# Altium PCB MAGI'sCore-AU.PcbDoc
Units mil, origin at the board's own origin, x right, y up, seen from the top; angles counter-clockwise.
Board outline 6000 x 4000 mil, 2 copper layers (Top Layer, Bottom Layer); 15 components, 32 nets, 96 pads, 17 vias.
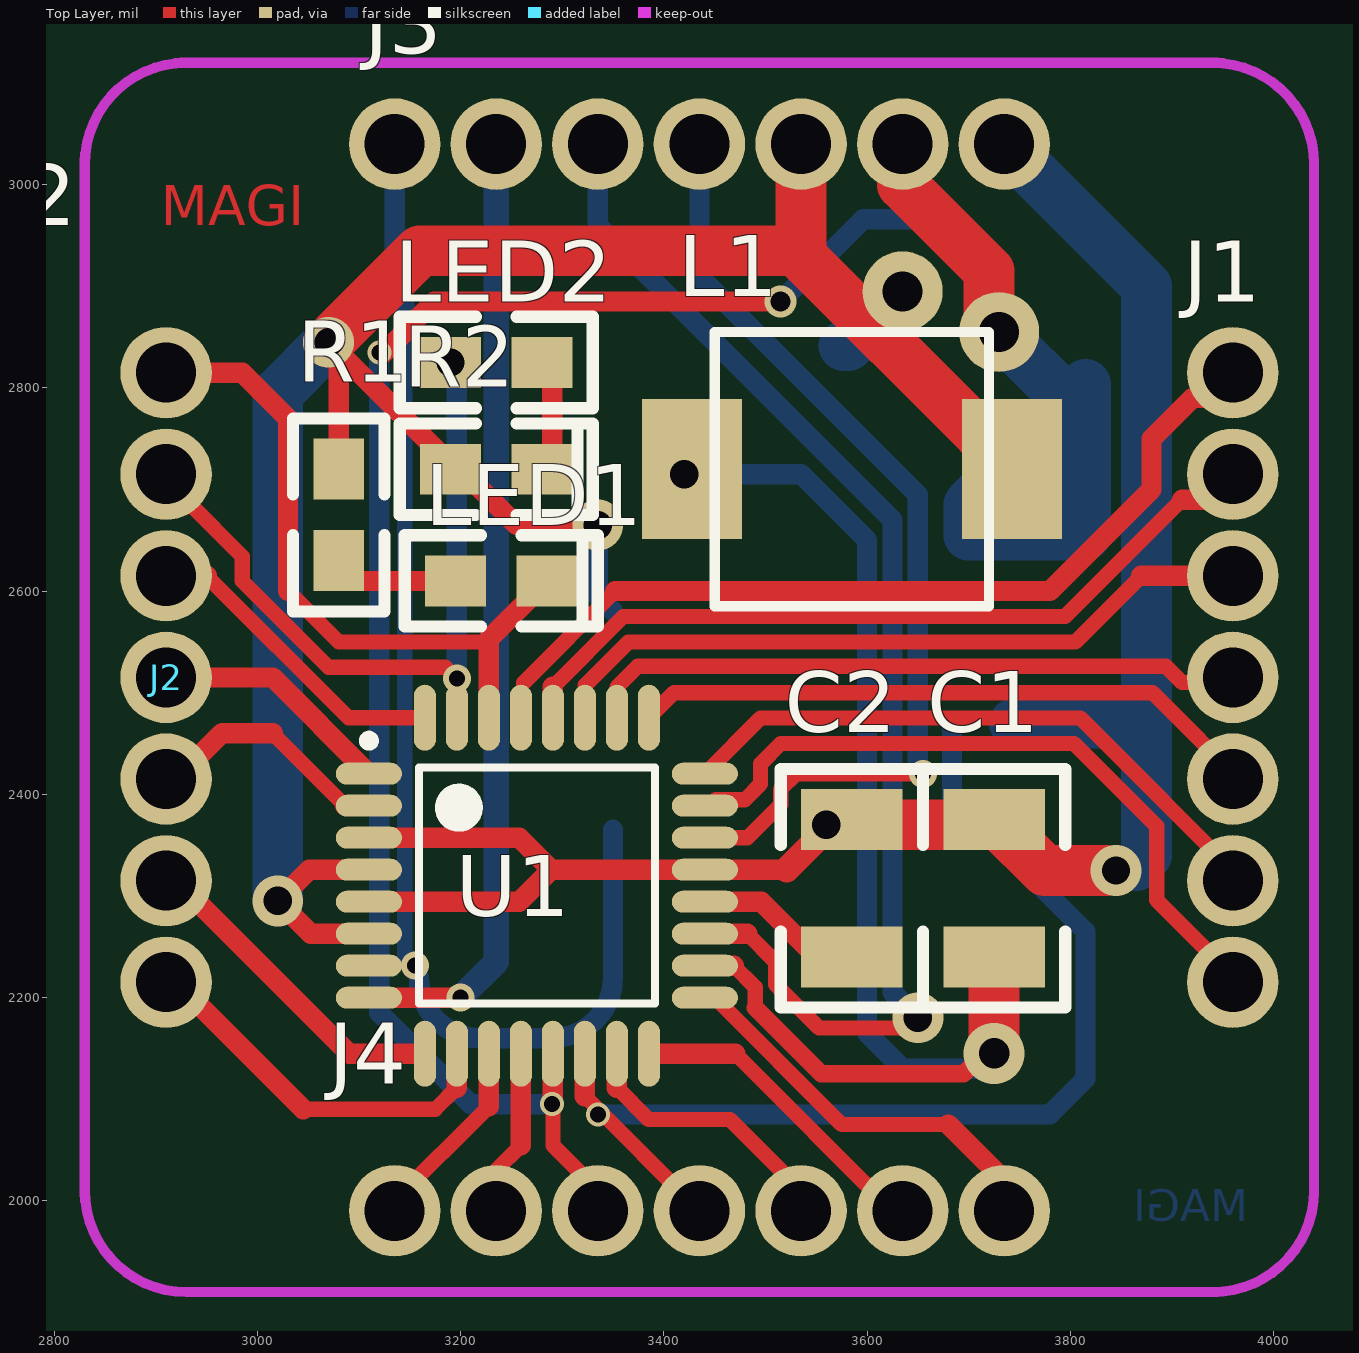
[diagram p0: Top Layer view]
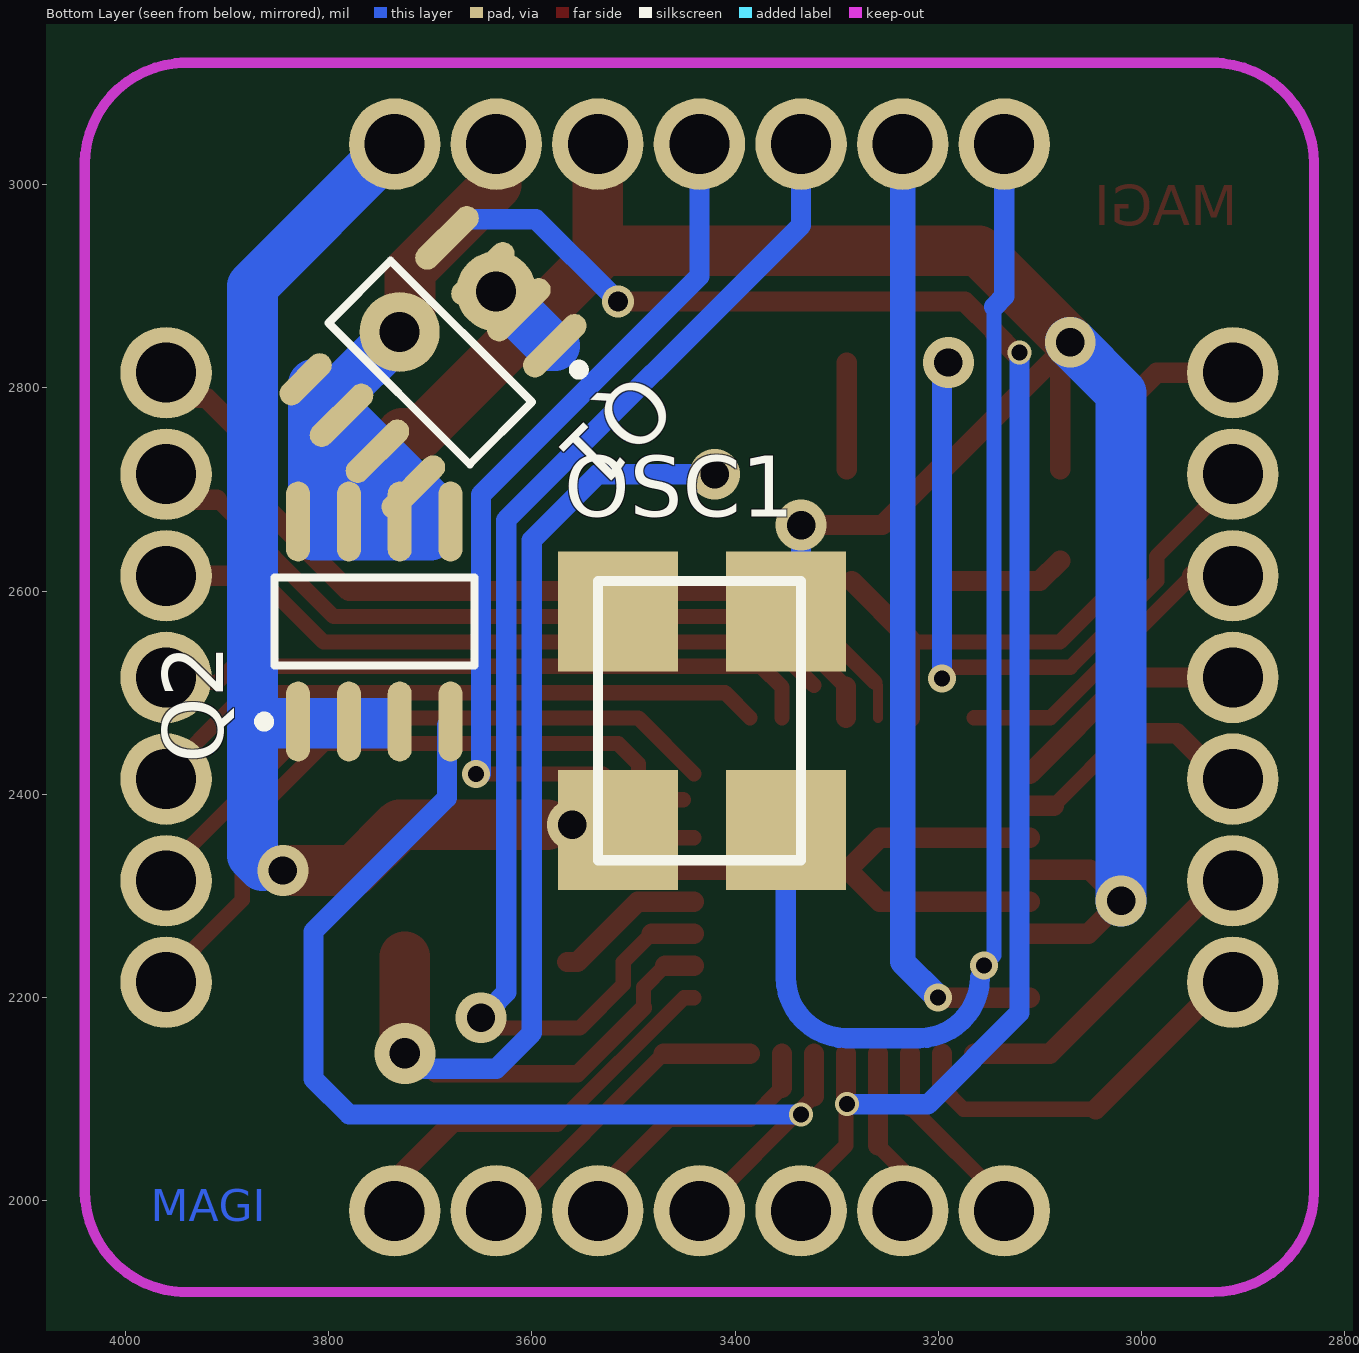
[diagram p1: Bottom Layer view, seen from below]

## Layer stack, top to bottom
Top Layer: signal copper 1.4
Dielectric: dielectric 12.6, FR-4, Dk 4.8
Bottom Layer: signal copper 1.4

## Board outline
1000,1000 7000,1000 7000,5000 1000,5000

## Design rules (kind name [scope] priority, off if disabled: settings)
Clearance [All] p1: gap=5
ComponentClearance [All] p1: gap=0 collisioncheckmode=3 verticalgap=0 showdistances=FALSE
PolygonConnect [All] p1: connectstyle=Relief reliefconductorwidth=10 reliefentries=4 polygonreliefangle="90 Angle" airgapwidth=10
RoutingVias [All] p1: holewidth=28 width=50 viastyle="Through Hole" minholewidth=28 minwidth=50 maxholewidth=28 maxwidth=50
SilkToSilkClearance [All] p1: silktosilkclearance=0
SolderMaskExpansion [All] p1: expansion=4
Width [All] p1: maxlimit=100 minlimit=10 preferedwidth=10
26 further rules are at their usual default settings.

## Components (designator, comment, footprint, x,y, rotation, side; value= is the part's Value field where it differs from the comment)
C1 "CAP_1" 1210 3725,2375 r270 top
C2 "CAP_1" 1210 3585,2375 r270 top
J1 "CON7" CON7 3960,2215 r90 top
J2 "CON7" CON7 2910,2815 r270 top
J3 "CON7" CON7 3735,3040 r180 top
J4 "CON7" CON7 3135,1990 r0 top
L1 "INDUCTOR" 22uh 3585,2720 r0 top
LED1 "LED_3" 0805 3195,2610 r0 top
LED2 "LED_3" 0805 3280,2825 r180 top
OSC1 "Oscillator" Oscillator 3410,2460 r270 bottom
Q1 "SI9424DY" SO-8_N#1 3700,2825 r315 bottom
Q2 "SI9426DY" SO-8_N#2 3755,2570 r90 bottom
R1 "RES1_1" 0805 3080,2630 r90 top
R2 "RES1_1" 0805 3280,2720 r180 top
U1 "ATmega8A-AU" 32A_N 3275,2310 r0 top

## Footprints (in the part's own frame and the unit in brackets; to place one, negate y for a bottom-side part, rotate by r counter-clockwise, add the part's x,y. Pads: shape width x height; smd on the part's side, far side on the other; paste and mask are expansions set on the pad)
22uh [mm]
  rect 2.5x3.5 smd: 1(-4,0) 2(4,0)
  silkscreen extent -3.43,-3.43 3.43,3.43
32A_N [mm] "32-Pin Thin Quad Flat Pack 0.8 mm Pitch, IPC Medium Density"
  oval 1.65x0.55 smd: 1(-4.2,2.8) 2(-4.2,2) 3(-4.2,1.2) 4(-4.2,0.4) 5(-4.2,-0.4) 6(-4.2,-1.2) 7(-4.2,-2) 8(-4.2,-2.8) 17(4.2,-2.8) 18(4.2,-2) 19(4.2,-1.2) 20(4.2,-0.4) 21(4.2,0.4) 22(4.2,1.2) 23(4.2,2) 24(4.2,2.8)
  oval 0.55x1.65 smd: 9(-2.8,-4.2) 10(-2,-4.2) 11(-1.2,-4.2) 12(-0.4,-4.2) 13(0.4,-4.2) 14(1.2,-4.2) 15(2,-4.2) 16(2.8,-4.2) 25(2.8,4.2) 26(2,4.2) 27(1.2,4.2) 28(0.4,4.2) 29(-0.4,4.2) 30(-1.2,4.2) 31(-2,4.2) 32(-2.8,4.2)
  silkscreen extent -4.32,-2.95 2.95,3.75, body extent -3.5,-3.5 3.5,3.5, height 1.2
0805 [mil]
  rect 60x50 smd: 1(0,0) 2(90,0)
  silkscreen extent -50,-45 140,45
1210 [mil]
  rect 60x100 smd: 1(0,0) 2(135,0)
  silkscreen extent -50,-70 185,70
CON7 [mil]
  round 90 hole 59.06: 1(0,0) 2(100,0) 3(200,0) 4(300,0) 5(400,0) 6(500,0) 7(600,0)
Oscillator [mil] "7mm*5mm"
  rect 118.11x118.11 smd: 1(-120,-105) 2(95,-105) 3(95,60) 4(-120,60)
  silkscreen extent -150,-125 125,75
SO-8_N#1 [mm] "SOIC, 8-Leads, Body 4.9x3.9mm, Pitch 1.27mm, IPC Medium Density"
  oval 2x0.6 smd: 1(-2.5,1.905) 2(-2.5,0.635) 3(-2.5,-0.635) 4(-2.5,-1.905) 6(2.5,-0.635) 7(2.5,0.635) 8(2.5,1.905)
  oval 1.6x0.6 smd: 5(2.5,-1.905)
  silkscreen extent -2.62,-2.5 1.1,2.88, body extent -2,-2.5 2,2.5, height 1.75
SO-8_N#2 [mm] "SOIC, 8-Leads, Body 4.9x3.9mm, Pitch 1.27mm, IPC Medium Density"
  oval 2x0.6 smd: 1(-2.5,1.905) 2(-2.5,0.635) 3(-2.5,-0.635) 4(-2.5,-1.905) 5(2.5,-1.905) 6(2.5,-0.635) 7(2.5,0.635) 8(2.5,1.905)
  silkscreen extent -2.62,-2.5 1.1,2.88, body extent -2,-2.5 2,2.5, height 1.75

## Part data
C1 C2: "Capacitor"
J1 J2 J3 J4: "Connector"
Q1: "P-Channel 2.5V (G-S)  MOSFET"
Q2: "N-Channel 2.5V (G-S) Rated  MOSFET"
U1: "8-bit AVR Microcontroller, 8KB Flash, 512 Bytes EEPROM, 1KB SRAM, 32-pin TQFP, Industrial Grade (-40癈 to 85癈)"

## Free pads (board coordinates)
  round 78.74 hole 39.37: 1(3635,2895) 2(3730,2855)

## Via types
v1: diameter 50, hole 28, Top Layer to Bottom Layer, 8 vias
v2: diameter 27.56, hole 15.75, Top Layer to Bottom Layer, 4 vias
v3: diameter 23.62, hole 15.75, Top Layer to Bottom Layer, 3 vias
v4: diameter 60, hole 30, Top Layer to Bottom Layer, 1 vias
v5: diameter 31.5, hole 19.68, Top Layer to Bottom Layer, 1 vias

## Nets (pads, with @x,y where several pads share a name; then routed paths per layer and width w, separated by ;. In a path a pad name is that pad's centre, name@x,y a point inside that pad or via, vN(x,y) a via of type N, cw(c..) or ccw(c..) an arc to the next point about the centre after c; other vN are vias at no path point)
ADC6: J3.5 U1.19 | length 1239.5
  Top Layer w15: 3482.24,2262.76 3510,2235 3510,2212.72 3552.72,2170 3645,2170 v1@3650,2175
  Top Layer w20: U1.19 3482.24,2262.76
  Bottom Layer w20: J3.5 3335,2960 3625,2670 3625,2205 v1@3640,2190
  other v1: 3650,2180
ADC7: J3.4 U1.22 | length 958.5
  Top Layer w15: U1.22 3482.24,2357.24 3515,2390 3515,2405 3530,2420 v2(3655,2420)
  Bottom Layer w20: J3.4 3435,2910 3650,2695 v2@3650,2420
GND: C1.1 C2.1 J3.1 OSC1.2 Q2.1 Q2.2 Q2.3 U1.3 U1.5 U1.21 | length 1870.2
  Top Layer w20: U1.5 3257.76,2294.25 3289.25,2325.75 ; U1.3 3257.76,2357.24 3289.25,2325.75 ; 3520.75,2325.75 U1.21 3289.25,2325.75
  Top Layer w25: 3520.75,2325.75 C2.1@3565,2370
  Top Layer w30: C2.1@3565,2370 C2.1@3585,2370
  Top Layer w50: C2.1@3585,2370 3730,2370 3775,2325 v1@3835,2325
  Bottom Layer w50: J3.1 3875,2900 3875,2470 ; 3745,2470 3875,2470 ; v1@3865,2330 3875,2340 3875,2470
  other v1: 3845,2325 3560,2370
MISO: J4.6 U1.16 | length 313.8
  Top Layer w15: 3470.35,2144.65 J4.6@3625,1990
  Top Layer w20: U1.16 3470.35,2144.65 ; J4.6@3625,1990 J4.6
MOSI: J4.5 U1.15 | length 276.6
  Top Layer w15: 3353.74,2111.26 3385,2080 3465,2080 J4.5@3535,2010
  Top Layer w20: 3353.74,2111.26 U1.15 ; J4.5 J4.5@3535,2010
NetC1_2: C1.2 L1.1 U1.18 | length 1269.2
  Top Layer w15: U1.18@3468.74,2231.26 3490,2210 3490,2190
  Top Layer w17: 3490,2190 3555,2125 3695,2125 v4@3725,2155
  Top Layer w20: U1.18 U1.18@3468.74,2231.26
  Top Layer w50: v4@3725,2140 v4(3725,2145) ; v4@3725,2155 C1.2
  Bottom Layer w20: v1(3420,2715) 3535,2715 3600,2650 3600,2165 3635,2130 v4@3720,2130
NetC2_2: C2.2 U1.20 | length 149.2
  Top Layer w20: U1.20 3495.75,2294.25 3555,2235 C2.2@3565,2235
NetJ1_1: J1.1 U1.23 | length 718.4
  Top Layer w15: U1.23@3451.02,2394.57 3479.57,2394.57 3495,2410 3495,2430 3515,2450 3803.79,2450 3885,2368.79 3885,2295.95 3975,2205.95 J1.1@3975,2190
NetJ1_2: J1.2 U1.24 | length 645.7
  Top Layer w15: U1.24 3495.12,2475 3810,2475 3975,2310 J1.2@3975,2290
NetJ1_3: J1.3 U1.25 | length 654.9
  Top Layer w15: U1.25 3409.88,2500 3880.95,2500 3975,2405.95 J1.3@3975,2390
NetJ1_4: J1.4 U1.26 | length 646.4
  Top Layer w15: U1.26 3353.74,2505.43 3374.21,2525.91 3894.09,2525.91 3910,2510 J1.4@3955,2510
NetJ1_5: J1.5 U1.27 | length 707.7
  Top Layer w15: U1.27@3322.24,2507.24 3365,2550 3805,2550 3870,2615
  Top Layer w20: 3870,2615 3950,2615 J1.5@3975,2590
NetJ1_6: J1.6 U1.28 | length 791
  Top Layer w15: U1.28@3290.75,2505.75 3360,2575 3795,2575 3910,2690
  Top Layer w20: U1.28 U1.28@3290.75,2505.75 ; 3910,2690 J1.6@3975,2690
NetJ2_3: J2.3 U1.32 | length 302.6
  Top Layer w15: J2.3@2950,2615 3089.65,2475.35 U1.32
  Top Layer w20: J2.3@2920,2615 J2.3@2950,2615
NetJ2_4: J2.4 U1.1 | length 228.9
  Top Layer w20: J2.4@2920,2515 3014.88,2515 U1.1
NetJ2_5: J2.5 U1.2 | length 237.8
  Top Layer w15: 3015,2460 U1.2@3086.26,2388.74
  Top Layer w20: J2.5@2920,2415 2965,2460 3015,2460 ; U1.2@3086.26,2388.74 U1.2
NetJ2_6: J2.6 U1.9 | length 315.3
  Top Layer w20: J2.6@2920,2315 3090.35,2144.65 U1.9
NetJ2_7: J2.7 U1.10 | length 370.2
  Top Layer w15: 3045,2090 3175,2090 3196.26,2111.26
  Top Layer w20: J2.7@2920,2215 3045,2090 ; 3196.26,2111.26 U1.10
NetJ4_1: J4.1 U1.11 | length 193.1
  Top Layer w15: J4.1@3135,2000 3227.76,2092.76
  Top Layer w20: J4.1 J4.1@3135,2000 ; 3227.76,2092.76 U1.11
NetJ4_2: J4.2 U1.12 | length 164.7
  Top Layer w15: J4.2 3235,2030 3259.25,2054.25
  Top Layer w20: 3259.25,2054.25 U1.12
NetLED1_1: LED1.1 R1.1 | length 123.3
  Top Layer w20: R1.1 3100,2610 LED1.1
NetLED2_1: LED2.1 R2.1 | length 105
  Top Layer w20: R2.1@3290,2720 LED2.1@3290,2825
OC1A: J4.3 Q1.4 U1.13 | length 1652.8
  Top Layer w15: v3@3290.75,2095 3290.75,2054.25 3335,2010 J4.3
  Top Layer w20: v3@3122.5,2832.5 3145,2855 3145,2856.21 3173.79,2885 v5(3515,2885) ; v3@3290.75,2095 U1.13
  Bottom Layer w20: v3(3120,2835) 3120,2185 3210,2095 v3(3290,2095) ; v5@3515,2890 3520,2890 3596.07,2966.07 3665,2966.07 Q1.4
OC1B: J4.4 Q2.4 U1.14 | length 1103.3
  Top Layer w15: 3322.24,2102.76 J4.4
  Top Layer w20: 3322.24,2102.76 U1.14
  Bottom Layer w19.68: v3(3335,2085) 3780,2085 3815,2120 3815,2265 3683.62,2396.38 3683.62,2467.95 Q2.4
PB6: J3.7 OSC1.3 U1.7 | length 1221.7
  Bottom Layer w15: 3145,2880 3145,2241.26 v2(3155,2231.26)
  Bottom Layer w20: J3.7 3135,2890 3145,2880 ; v2@3158.86,2220 ccw(c3218.86,2220) 3218.86,2160 3290,2160 ccw(c3290,2220) 3350,2220 OSC1.3
PB7: J3.6 U1.8 | length 944.9
  Top Layer w20: U1.8 3199.76,2199.76 v2(3200,2200)
  Bottom Layer w25: v2(3200,2200) 3235,2235 J3.6
PO: J3.2 pad.2 Q1.5 Q1.6 Q1.7 Q1.8 Q2.5 Q2.6 Q2.7 Q2.8 | length 785.3
  Top Layer w50: J3.2 3635,3000 3720,2915 pad.2@3720,2845
  Bottom Layer w50: pad.2 3800,2785 ; Q1.5@3815,2803.44 3815,2770 ; 3800,2785 3700,2685 3700,2655 3815,2655 3815,2770 ; 3800,2785 3815,2770
RST: J1.7 U1.29 | length 889.8
  Top Layer w10: U1.29 U1.29@3259.25,2507.09
  Top Layer w15: 3262.17,2510 3352.17,2600
  Top Layer w20: 3352.17,2600 3780,2600 3880,2700 3880,2750 3920,2790 J1.7@3975,2790
RXD: J2.1 LED1.2 U1.30 | length 750.1
  Top Layer w15: 3030,2600 3080,2550 3227.76,2550
  Top Layer w20: J2.1@2920,2815 2985,2815 3030,2770 3030,2600 ; 3227.76,2550 U1.30 3227.76,2552.76 LED1.2
SCK: J4.7 U1.17 | length 399.1
  Top Layer w15: U1.17 3450.24,2199.76 3575,2075 3680,2075
  Top Layer w20: 3680,2075 3735,2020 J4.7
TXD: J2.2 LED2.2 U1.31 | length 664
  Top Layer w15: J2.2@2932.03,2687.03 2985,2634.05 2985,2610 3070,2525 3185,2525 v2(3196.26,2513.74)
  Bottom Layer w20: v1(3190,2825) 3196.26,2818.74 v2(3196.26,2513.74)
VCC: J3.3 L1.2 OSC1.4 pad.1 Q1.1 Q1.2 Q1.3 R1.2 R2.2 U1.4 U1.6 | length 2273.9
  Top Layer w20: v1(3070,2845) v1@3080,2835 ; R1.2 v1@3080,2835 ; U1.6 3052.24,2262.76 v1(3020,2295) 3050.75,2325.75 U1.4 ; v1(3335,2665) 3255,2665 3200,2720 3195,2720 v1@3080,2835
  Top Layer w50: v1(3070,2845) 3160,2935 3535,2935 ; J3.3 3535,2935 ; L1.2@3727.5,2755 3710,2755 3535,2930 3535,2935
  Bottom Layer w20: v1(3335,2665) 3335,2595 OSC1.4
  Bottom Layer w50: v1(3020,2295) 3020,2790 ; 3020,2795 v1(3070,2845) ; Q1.1 3581.56,2841.56 pad.1
pads on no net: OSC1.1

## Polygon pours and split planes (outlines as drawn)
no net on Bottom Solder "Top Layer-No Net" (solid): 3840,2625 3670,2625 3670,2695 3815,2840 3840,2815 3840,2640
no net on Bottom Solder "Top Layer-No Net" (solid): 3680,2890 3605,2815 3600,2815 3550,2865 3630,2945

## Keep-outs
Keep-Out Layer:
  lines w10: 2830,2005 2830,2805 2830,3025 ; 2830,2010 ccw(c2930,2010) 2930,1910 3945,1910 ; 2830,3020 cw(c2930,3020) 2930,3120 ; 2925,3120 3945,3120 ; 3940,1910 ccw(c3940,2010) 4040,2010 ; 3940,3120 cw(c3940,3020) 4040,3020 ; 4040,2005 4040,3025

## Other copper
Top Layer:
  text "MAGI" at 2905,2960 h39.37
Bottom Layer:
  rectangle net PO: 3730,2668.43 3800,2740
  text "MAGI" at 3975,1980 h31.5

## Silkscreen, mask and mechanical layers (free items; w line width, h text height)
Top Overlay:
  lines w11.81: 3315,2675 3315,2765 ; 3320,2565 3320,2655
Top Solder:
  lines w10: 3554.59,2902.97 3627.03,2902.97 3635,2895
  lines w50: 3535,3040 3535,2930 3585,2880 3620,2880 3635,2895 ; 3540,2925 3615,2925 ; 3635,3040 3635,3000 3720,2915 3720,2855
Bottom Solder:
  lines w50: 3730,2855 3785,2800 ; 3735,3040 3875,2900 3875,2470 3740,2470
Mechanical 1:
  lines w10: 2830,2005 2830,2805 2830,3025 ; 2830,2010 ccw(c2930,2010) 2930,1910 3945,1910 ; 2830,3020 cw(c2930,3020) 2930,3120 3945,3120 ; 3940,1910 ccw(c3940,2010) 4040,2010 ; 3940,3120 cw(c3940,3020) 4040,3020 ; 4040,2005 4040,3025